# EAGLE board XMICRO Backplane Dimenisons (EAGLE 6.3)

No outline drawn. Coordinates in mm, seen from the top.
Copper layers (1*16): Top 0.03048125mm / dielectric 62mil / Bottom 0.03048125mm
Design rules "EasyEDA Conservative *": minimum track width 10mil, minimum drill 20mil, track to track 12mil, track to pad 12mil, pad to pad 12mil, via to via 12mil, smd to smd 8mil, copper to edge 40mil, drill to drill 10mil, minimum pad ring 10mil, minimum via ring 8mil, stop-mask expansion 4mil, vias tented up to drill 50mil, thermal gap 10mil
Net classes: 1 GND: width 0.254 mm, clearance 0.381 mm

## Footprints (pad centres in the part's own frame; a part is rotated, then mirrored left to right if it is on the bottom)
EDGE62F = drill 1.016 long: 1 -38.1,-2.426; 2 -38.1,2.426; 3 -35.56,-2.426; 4 -35.56,2.426; 5 -33.02,-2.426; 6 -33.02,2.426; 7 -30.48,-2.426; 8 -30.48,2.426; 9 -27.94,-2.426; 10 -27.94,2.426; 11 -25.4,-2.426; 12 -25.4,2.426; 13 -22.86,-2.426; 14 -22.86,2.426; 15 -20.32,-2.426; 16 -20.32,2.426; 17 -17.78,-2.426; 18 -17.78,2.426; 19 -15.24,-2.426; 20 -15.24,2.426; 21 -12.7,-2.426; 22 -12.7,2.426; 23 -10.16,-2.426; 24 -10.16,2.426; 25 -7.62,-2.426; 26 -7.62,2.426; 27 -5.08,-2.426; 28 -5.08,2.426; 29 -2.54,-2.426; 30 -2.54,2.426; 31 0,-2.426; 32 0,2.426; 33 2.54,-2.426; 34 2.54,2.426; 35 5.08,-2.426; 36 5.08,2.426; 37 7.62,-2.426; 38 7.62,2.426; 39 10.16,-2.426; 40 10.16,2.426; 41 12.7,-2.426; 42 12.7,2.426; 43 15.24,-2.426; 44 15.24,2.426; 45 17.78,-2.426; 46 17.78,2.426; 47 20.32,-2.426; 48 20.32,2.426; 49 22.86,-2.426; 50 22.86,2.426; 51 25.4,-2.426; 52 25.4,2.426; 53 27.94,-2.426; 54 27.94,2.426; 55 30.48,-2.426; 56 30.48,2.426; 57 33.02,-2.426; 58 33.02,2.426; 59 35.56,-2.426; 60 35.56,2.426; 61 38.1,-2.426; 62 38.1,2.426

## Placement (x,y rotation side)
0  XMICRO-BUS-PHYSICAL-EDGE62F  [EDGE62F]  152.4,85.09 0 top
1  XMICRO-BUS-PHYSICAL-EDGE62F  [EDGE62F]  152.4,66.04 0 top
2  XMICRO-BUS-PHYSICAL-EDGE62F  [EDGE62F]  152.4,46.99 0 top
3  XMICRO-BUS-PHYSICAL-EDGE62F  [EDGE62F]  152.4,27.94 0 top
4  XMICRO-BUS-PHYSICAL-EDGE62F  [EDGE62F]  152.4,8.89 0 top

## Library data of the parts
0 1-4 = Custom

## Text on the board
tDocu: 2" TO CONNECTOR CENTER | 0.1" | CARD SLOT 0 | PIN 1 | 0.75" | BACKPLANE REAR PCB EDGE | SYSTEM FRONT | INSIDE SURFACE OF CHASSIS | CARD MAXIMUM DIMENSIONS | CARD PCB | NOTES: / 1. All dimensions are in inches